# Altium PCB Marmota.pcbdoc
Units mil, origin at the board's own origin, x right, y up, seen from the top; angles counter-clockwise.
Board outline 653.54 x 381.1 mil, 4 copper layers (Top Layer, Inner1, Inner2, Bottom Layer), stack 22.834 mil thick; 27 components, 22 nets, 93 pads, 42 vias.
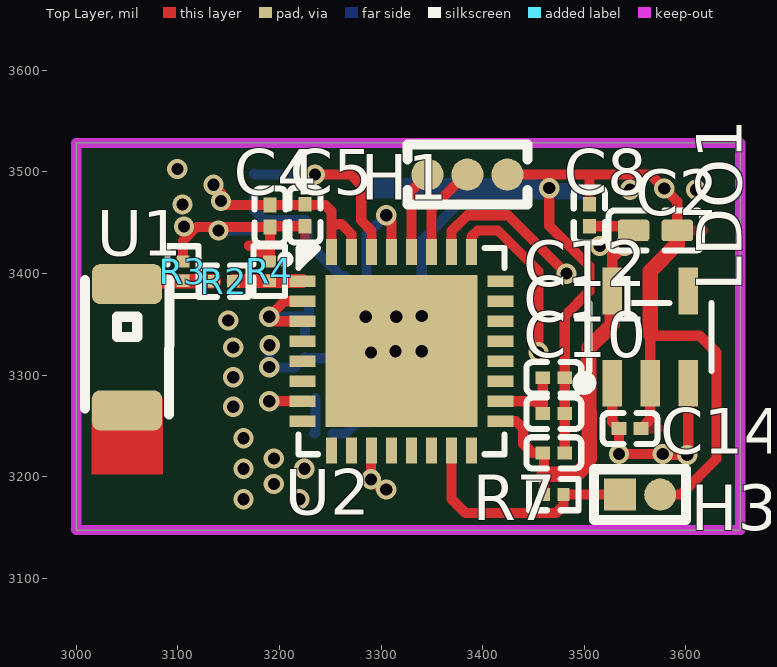
[diagram p0: Top Layer view]
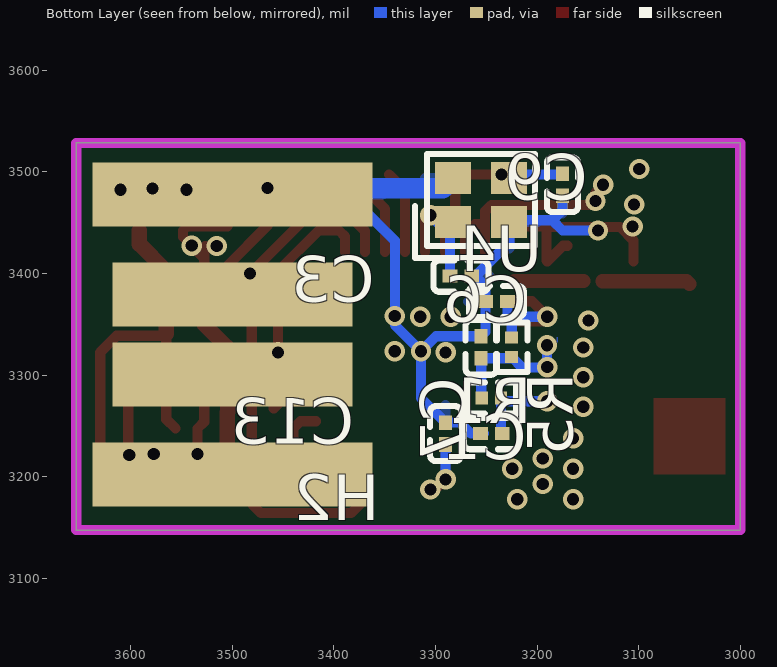
[diagram p1: Bottom Layer view, seen from below]
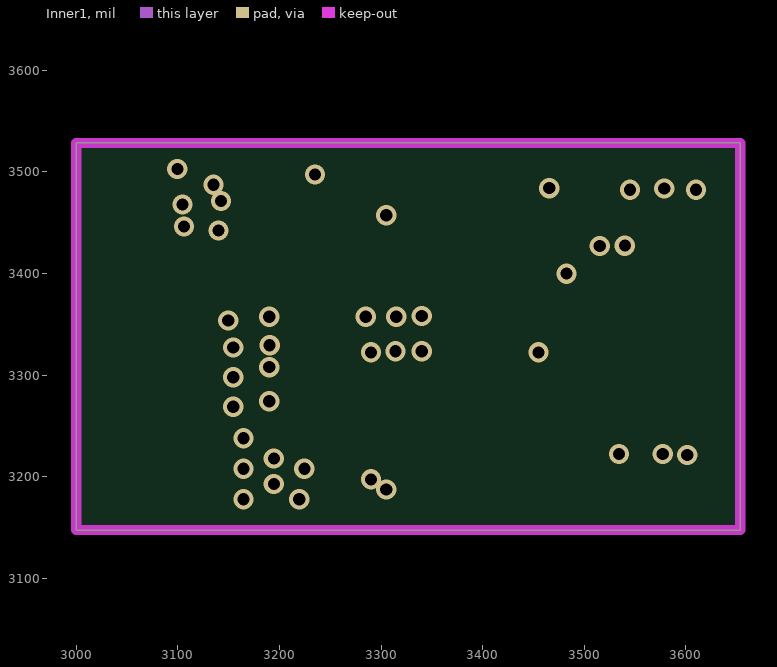
[diagram p2: Inner1]
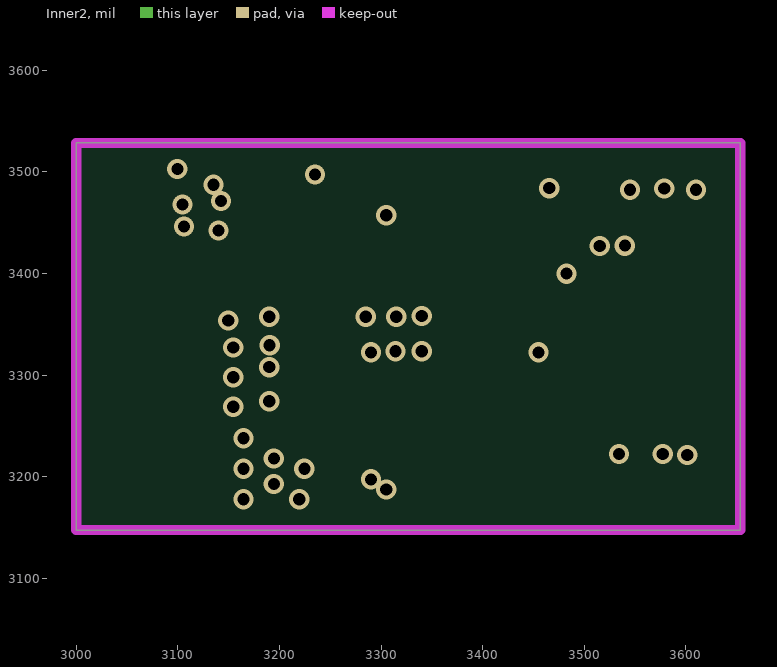
[diagram p3: Inner2]

## Layer stack, top to bottom
Top Solder Mask Layer: solder mask 0.394, Dk 0
Top Layer: signal copper 1.378
Dielectric1: surface 5.774, 7628 RC49% 8.6mil, Dk 0
Inner1: signal copper 1.378
Dielectric2: surface 5.774, 1.1mm H/HOZ Copper, Dk 0
Inner2: signal copper 1.378
Dielectric3: surface 5.774, 7628 RC49% 8.6mil, Dk 0
Bottom Layer: signal copper 1.378
Bottom Solder Mask Layer: solder mask 0.394, Dk 0

## Board outline
3000,3528.46 3653.54,3528.46 3653.54,3147.36 3000,3147.36

## Design rules (kind name [scope] priority, off if disabled: settings)
BoardOutlineClearance copperThickness1oz [All] p0: genericclearance=10 ignorepadtopadclearanceinfootprint=FALSE except(0: Arc-SplitContinuation Track-SplitContinuation SMDPad-SplitContinuation THPad-SplitContinuation Via-SplitContinuation Fill-SplitContinuation Poly-SplitContinuation Region-SplitContinuation Text-SplitContinuation)
BoardOutlineClearance copperThickness2oz [All] p0: genericclearance=10 ignorepadtopadclearanceinfootprint=FALSE except(0: Arc-SplitContinuation Track-SplitContinuation SMDPad-SplitContinuation THPad-SplitContinuation Via-SplitContinuation Fill-SplitContinuation Poly-SplitContinuation Region-SplitContinuation Text-SplitContinuation)
BoardOutlineClearance otherClearance [All] p0: genericclearance=10 ignorepadtopadclearanceinfootprint=FALSE except(0: Arc-SplitContinuation Track-SplitContinuation SMDPad-SplitContinuation THPad-SplitContinuation Via-SplitContinuation Fill-SplitContinuation Poly-SplitContinuation Region-SplitContinuation Text-SplitContinuation)
Clearance copperThickness1oz [All] p1: gap=7 ignorepadtopadclearanceinfootprint=FALSE
Clearance copperThickness2oz [All] p1: gap=7 ignorepadtopadclearanceinfootprint=FALSE
Clearance otherClearance [All] p1: gap=7 ignorepadtopadclearanceinfootprint=FALSE
DiffPairsRouting differentialPair [All] p1: maxuncoupledlength=10 minlimit=6 maxlimit=Infinity mostfreqgap=6 toplayer_minwidth=5 toplayer_prefwidth=10 toplayer_maxwidth=100 bottomlayer_minwidth=5 bottomlayer_prefwidth=10 bottomlayer_maxwidth=100 midlayer1_minwidth=5 midlayer1_prefwidth=10 midlayer1_maxwidth=100 midlayer2_minwidth=5 midlayer2_prefwidth=10 midlayer2_maxwidth=100
PasteMaskExpansion pasteMaskExpansion [All] p1: expansion=0
PlaneConnect innerPlane [All] p1: planeconnectstyle=Relief reliefexpansion=20 reliefentries=4 reliefconductorwidth=10 reliefairgap=10
PolygonConnect copperRegion [All] p1: connectstyle=Relief reliefentries=4 reliefconductorwidth=10 polygonreliefangle="90 Angle" airgapwidth=10
RoutingVias viaSize [All] p1: viastyle="Through Hole" holewidth=12.0078 minholewidth=11.811 maxholewidth=248.0314 width=12.0078 minwidth=11.811 maxwidth=248.0314
SolderMaskExpansion solderMaskExpansion [All] p1: useseparateexpansions=TRUE expansion=2 expansionbottom=2
Width copperThickness1oz [All] p1: maxlimit=100 minlimit=5 preferedwidth=10
Width copperThickness2oz [All] p1: maxlimit=100 minlimit=8 preferedwidth=10

## Components (designator, comment, footprint, x,y, rotation, side; value= is the part's Value field where it differs from the comment)
C1 "" C0201 3245,3242.36 r180 bottom
C2 "" C0402 3570,3442.36 r180 top
C3 "" C0201 3275,3397.36 r180 bottom
C4 "" C0201 3190.8,3456.56 r90 top
C5 "" C0201 3225,3457.36 r90 top
C6 "" C0201 3240,3372.36 r180 bottom
C7 "" C0201 3255,3327.36 r270 bottom
C8 "" C0201 3505,3457.36 r270 top
C9 "" C0201 3175,3487.36 r90 bottom
C10 "" C0201 3470,3223.46 r180 top
C11 "" C0201 3470,3262.36 r0 top
C12 "" C0201 3470,3297.36 r0 top
C13 "" C0201 3290,3242.36 r270 bottom
C14 "" C0201 3545,3247.36 r180 top
H1 "" HDR-TH_3P-P1.00-V-M-3 3385,3497.36 r0 top
H2 "" HDR-TH_4P-P2.54-V-M 3500,3202.36 r90 bottom
H3 "" HDR-TH_2P-P1.00-V-M 3555,3182.36 r0 top
LDO1 "" SOT-23-5_L3.0-W1.7-P0.95-LS2.8-BL 3565,3337.36 r0 top
R1 "" R0201 3245,3277.36 r0 bottom
R2 "" R0201 3145,3392.36 r180 top
R3 "" R0201 3105,3402.36 r270 top
R4 "" R0201 3190,3402.36 r270 top
R5 "" R0201 3225,3327.36 r270 bottom
R7 "" R0201 3470,3182.36 r0 top
U1 "" ANT-SMD_L3.2-W1.6 3050,3327.36 r270 top
U2 "" QFN-32_L5.0-W5.0-P0.50-TL-EP3.7 3320,3323.46 r0 top
U4 "" CRYSTAL-SMD_4P-L2.0-W1.6-BL 3255,3472.36 r180 bottom

## Footprints (in the part's own frame and the unit in brackets; to place one, negate y for a bottom-side part, rotate by r counter-clockwise, add the part's x,y. Pads: shape width x height; smd on the part's side, far side on the other; paste and mask are expansions set on the pad)
ANT-SMD_L3.2-W1.6 [mil]
  rrect40% 39.4x68.9 smd: 1(-62.1,0) 2(62.1,0)
  Top Layer region: 50,35 125,35 125,-35 50,-35
  silkscreen extent -66,-41 66,42
C0201 [mil]
  rect 14.51x12.76 smd: 1(-10.8,0) 2(10.8,0)
  silkscreen extent -27,-15 27,15
C0402 [mm]
  rrect30% 0.79x0.54 smd: 1(-0.545,0) 2(0.545,0)
  silkscreen extent -1.17,-0.5 1.17,0.5
CRYSTAL-SMD_4P-L2.0-W1.6-BL [mm]
  rect 0.9x0.8 smd: 1(-0.7,-0.55) 2(0.7,-0.55) 3(0.7,0.55) 4(-0.7,0.55)
  silkscreen extent -1.65,-1.45 1.35,1.15
HDR-TH_2P-P1.00-V-M [mm]
  rect 0.8x0.8 smd: 1(-0.5,0)
  round 0.8 smd: 2(0.5,0)
  silkscreen extent -1.15,-0.64 1.15,0.64
HDR-TH_3P-P1.00-V-M-3 [mm]
  round 0.8 smd: 1(-1,0) 2(0,0) 3(1,0)
  silkscreen extent -1.5,-0.75 1.5,0.75
HDR-TH_4P-P2.54-V-M [mm]
  rect 1.6x7 smd: 1(0,0) 4(7,0)
  rect 1.6x6 smd: 2(2.5,0) 3(4.5,0)
QFN-32_L5.0-W5.0-P0.50-TL-EP3.7 [mm]
  rect 0.65x0.28 smd: 1(-2.478,1.75) 2(-2.478,1.25) 3(-2.478,0.75) 4(-2.478,0.25) 5(-2.478,-0.25) 6(-2.478,-0.75) 7(-2.478,-1.25) 8(-2.478,-1.75) 17(2.478,-1.75) 18(2.478,-1.25) 19(2.478,-0.75) 20(2.478,-0.25) 21(2.478,0.25) 22(2.478,0.75) 23(2.478,1.25) 24(2.478,1.75)
  rect 0.28x0.65 smd: 9(-1.75,-2.478) 10(-1.25,-2.478) 11(-0.75,-2.478) 12(-0.25,-2.478) 13(0.25,-2.478) 14(0.75,-2.478) 15(1.25,-2.478) 16(1.75,-2.478) 25(1.75,2.478) 26(1.25,2.478) 27(0.75,2.478) 28(0.25,2.478) 29(-0.25,2.478) 30(-0.75,2.478) 31(-1.25,2.478) 32(-1.75,2.478)
  rect 3.8x3.8 smd: 33(0,0)
  silkscreen extent -3,-2.58 2.58,2.58
R0201 [mil]
  rect 11.93x12.76 smd: 1(-9.51,0) 2(9.51,0)
  silkscreen extent -24,-15 24,15
SOT-23-5_L3.0-W1.7-P0.95-LS2.8-BL [mm]
  rect 0.49x1.157 smd: 1(-0.95,-1.154) 2(0,-1.154) 3(0.95,-1.154)
  rect 0.49x1.175 smd: 4(0.95,1.154) 5(-0.95,1.154)
  silkscreen extent -1.8,-1.29 1.53,0.85

## Via types
v1: diameter 20, hole 12.01, Top Layer to Bottom Layer, 42 vias

## Nets (pads, with @x,y where several pads share a name; then routed paths per layer and width w, separated by ;. In a path a pad name is that pad's centre, name@x,y a point inside that pad or via, vN(x,y) a via of type N, cw(c..) or ccw(c..) an arc to the next point about the centre after c; other vN are vias at no path point)
$1N1: R2.2 R3.2 U1.1 | length 86.7
  Top Layer w13.8: U1.1 3052.9,3392.36 R2.2
$1N4: R2.1 R4.2 U2.1 | length 67.9
  Top Layer w13.8: R2.1 U2.1
$1N5: C6.2 R5.1 U2.2 U2.3 | length 145.5
  Top Layer w10: U2.3 3194.37,3352.99 v1(3190,3357.36) 3190,3357.67 3205,3372.67 U2.2
  Bottom Layer w10: v1(3190,3357.36) 3225,3357.36 ; R5.1 3225,3357.36 ; C6.2 3229.2,3361.56 3225,3357.36
ESP_EN: C1.2 R1.1 U2.7 | length 114.8
  Top Layer w10: v1(3190,3274.25) U2.7
  Bottom Layer w10: v1(3190,3274.25) 3232.38,3274.25 R1.1 3235.49,3243.65 C1.2
GND: C1.1 C2.1 C3.2 C4.1 C5.1 C6.1 C7.1 C8.1 C9.1 C10.1 C11.2 C12.2 C13.1 C14.1 H1.3 H2.4 H3.2 LDO1.2 R3.1 R4.1 U2.33 U4.2 U4.4 | length 2154.3
  Top Layer w10: R3.1 3105,3432.36 3118.4,3445.76 C4.1 ; 3170,3427.36 3174.51,3427.36 R4.1 3190.8,3412.67 C4.1 ; C5.1 3191.6,3446.56 C4.1 ; H1.3 3502.77,3497.36 ; v1(3465.46,3484.01) 3465.46,3446.9 3505,3407.36 3505,3382.36 3480.8,3358.16 C12.2 3480.8,3267.36 C10.1 ; C8.1 3505,3495.13 3502.77,3497.36 ; C14.1 3565,3256.56 LDO1.2 3565,3340.58 3566.91,3338.67 3613.69,3338.67 3630,3322.36 3630,3217.36 3595,3182.36 H3.2 ; C2.1 3591.46,3470.9 v1(3578.63,3483.73) 3565,3497.36 3502.77,3497.36
  Top Layer w15: 3565,3340.58 3565,3402.36 3591.46,3428.82 C2.1
  Bottom Layer w10: v1(3140,3442.36) 3175,3442.36 3185,3452.36 ; C9.1 3175,3462.36 3185,3452.36 ; C1.1@3252.44,3242.36 3265,3242.36 3275.8,3253.16 C13.1 3314.19,3277.35 v1(3314.19,3323.46) ; C3.2 C3.2@3260.8,3397.36 ; v1(3465.46,3484.01) 3493.94,3484.01 H2.4 3385.59,3477.95 3340,3432.36 v1(3340,3358.14) 3340,3349.27 v1(3314.19,3323.46) ; 3185,3452.36 3225.79,3452.36 U4.2 3227.44,3430.72 C3.2@3260.8,3397.36 ; C3.2@3260.8,3397.36 3250.8,3387.36 C6.1 3250.8,3342.36 C7.1 3299.5,3338.16 v1(3314.19,3323.46)
  Bottom Layer w20: U4.4 3292.56,3484.01 v1(3465.46,3484.01)
  other v1: 3164.51,3177.85 3219.51,3177.85 3194.51,3192.85 3164.51,3207.85 3224.51,3207.85 3194.51,3217.85 3164.51,3237.85 3154.51,3268.89 3154.51,3297.85 3290,3322.36 3340.01,3323.46 3154.51,3327.13 3149.51,3353.79 3285,3357.36 3315,3357.36 3105.98,3446.25 3104.51,3467.85 3545,3482.36 3610,3482.36 3099.51,3502.85
GPIO2: U2.6
GPIO9: H3.1 R7.2 U2.15 | length 223.4
  Top Layer w10: U2.15 3369.21,3178.15 3383.2,3164.16 3471.8,3164.16 3479.51,3171.87 R7.2 H3.1@3525.32,3182.36
RX: H1.1 U2.28 | length 82.9
  Top Layer w10: U2.28 3329.84,3481.57 H1.1
SPICLK: U2.22
SPICS0: U2.21
SPID: U2.23
SPIHD: U2.19
SPIQ: U2.24
SPIWP: U2.20
TX: H1.2 U2.27 | length 92
  Top Layer w10: U2.27 3349.53,3463.46 3383.44,3497.36 H1.2
USB_DN: H2.2 U2.25 | length 180.2
  Top Layer w10: U2.25@3388.9,3421.26 3388.9,3436.26 3395,3442.36 3415,3442.36 3455,3402.36 v1(3455,3322.36)
USB_DP: H2.3 U2.26 | length 164.2
  Top Layer w10: U2.26 3369.21,3441.57 3385,3457.36 3425,3457.36 v1(3482.5,3399.86)
VBUS: C14.2 H2.1 LDO1.1 LDO1.3 | length 207.6
  Top Layer w10: LDO1.1 3527.6,3253.96 C14.2 3534.2,3228.16 3540,3222.36 v1(3577.23,3222.36) 3578.31,3221.28 v1(3601.41,3221.28) 3602.4,3222.28 LDO1.3
  other v1: 3534.2,3222.36
VDD3V3: C2.2 C4.2 C5.2 C7.2 C8.2 C10.2 C13.2 LDO1.5 R1.2 R5.2 R7.1 U2.11 U2.17 U2.31 U2.32 | length 896.5
  Top Layer w10: v1(3135,3487.36) 3142.5,3479.86 v1(3142.5,3471.25) 3146.39,3467.36 C4.2 3245,3467.36 3251.1,3461.26 3251.1,3448.46 ; U2.32 3251.1,3448.46 ; U2.31 3270.79,3438.83 3261.16,3448.46 3251.1,3448.46 ; U2.11 3290,3225.45 v1(3290,3197.36) 3300,3187.36 v1(3305,3187.36) ; U2.17 3432.8,3254.56 3440,3247.36 3440,3232.36 3448.9,3223.46 C10.2 3460.49,3222.17 3460.49,3202.36 R7.1 ; C8.2 3544.34,3446.56 C2.2 3548.54,3435.98 v1(3539.96,3427.4) 3527.6,3415.04 ; v1(3515.3,3427.05) 3526.58,3427.05 3527.6,3426.02 3527.6,3415.04 ; LDO1.5 3527.6,3415.04
  Top Layer w15: 3460.49,3202.36 3490,3202.36 3491.24,3203.6 3493.64,3203.6 3501.54,3211.5 3501.54,3213.9 3505,3217.36 3505,3263.05 3504.47,3263.58 3504.47,3320.3 3505,3320.83 3505,3327.36 3527.6,3349.96 LDO1.5
  Bottom Layer w10: v1(3190.28,3329.41) 3190.28,3308.13 v1(3190,3307.85) 3190.49,3307.36 3214.51,3307.36 R5.2 3226.29,3316.56 C7.2 3255,3277.85 R1.2 ; v1(3290,3197.36) C13.2
VDD_SPI: C11.1 C12.1 U2.18 | length 74.5
  Top Layer w10: U2.18 3452.31,3274.25 3459.2,3267.36 C12.1
XTAL_N: C3.1 U2.29 U4.1 | length 106.4
  Top Layer w10: v1(3305,3457.36) 3310.16,3452.2 U2.29
  Bottom Layer w10: C3.1 3285.8,3438.16 v1(3305,3457.36)
XTAL_P: C9.2 U2.30 U4.3 | length 180.2
  Top Layer w10: v1(3235,3497.36) 3270,3497.36 3280.47,3486.89 3280.47,3452.21 3290.47,3442.21 U2.30
  Bottom Layer w10: C9.2 3175.8,3497.36 v1(3235,3497.36)
pads on no net: LDO1.4 U1.2 U2.4 U2.5 U2.8 U2.9 U2.10 U2.12 U2.13 U2.14 U2.16

## Polygon pours and split planes (outlines as drawn)
GND on Bottom Layer (solid, remove dead copper, pour order 8): 3374.72,3526.89 3374.72,3147.36 3145,3147.36 3145,3342.36 3085,3402.36 3085,3528.46 3373.15,3528.46
VDD3V3 on Inner1 (solid, remove dead copper): 3550.71,3453.19 3558.14,3445.76 3558.14,3280.5 3445,3167.36 3280,3167.36 3249.48,3197.88 3249.48,3272.36 3224.48,3297.36 3175,3297.36 3155,3317.36 3155,3352.36 3190.8,3388.16 3190.8,3426.53 3170.77,3446.56 3151.41,3446.56 3125,3472.97 3125,3497.36 3136.05,3508.41 3164.7,3508.41 3241.38,3431.73 3451.23,3431.73 3472.69,3453.19
GND on Inner2 (solid, remove dead copper): 3090.61,3528.46 3653.54,3528.46 3653.54,3147.36 3144.97,3147.36 3144.97,3343.73 3090.61,3398.08
GND on Top Layer (solid, remove dead copper, pour order 0): 3088.38,3528.46 3648.9,3528.46 3655,3522.36 3655,3152.36 3650,3147.36 3143.01,3147.36 3143.01,3357.36 3158.01,3372.36 3210,3372.36 3214.09,3376.45 3214.09,3416.49 3088.62,3416.49 3088.38,3416.74
VDD3V3 on Bottom Layer (solid, remove dead copper, pour order 4): 3179.92,3332.28 3179.92,3337.28 3180,3337.36 3180,3332.36
VDD3V3 on Bottom Layer (solid, remove dead copper, pour order 6): 3180,3302.36 3180,3332.36 3190,3342.36 3200,3342.36 3215,3327.36 3264.38,3327.36 3264.38,3306.31 3268.62,3302.07 3260.48,3293.93 3222.46,3293.93 3219.03,3297.36 3185,3297.36

## Keep-outs
Board Outline Layer:
  the board outline again, w10